# Altium PCB PCB2.PcbDoc
Units mil, origin at the board's own origin, x right, y up, seen from the top; angles counter-clockwise.
Board outline 2100 x 2100 mil, 2 copper layers (Top Layer, Bottom Layer); 94 components, 45 nets, 320 pads, 45 vias.
Unrouted connection lines stored in the file: 2.
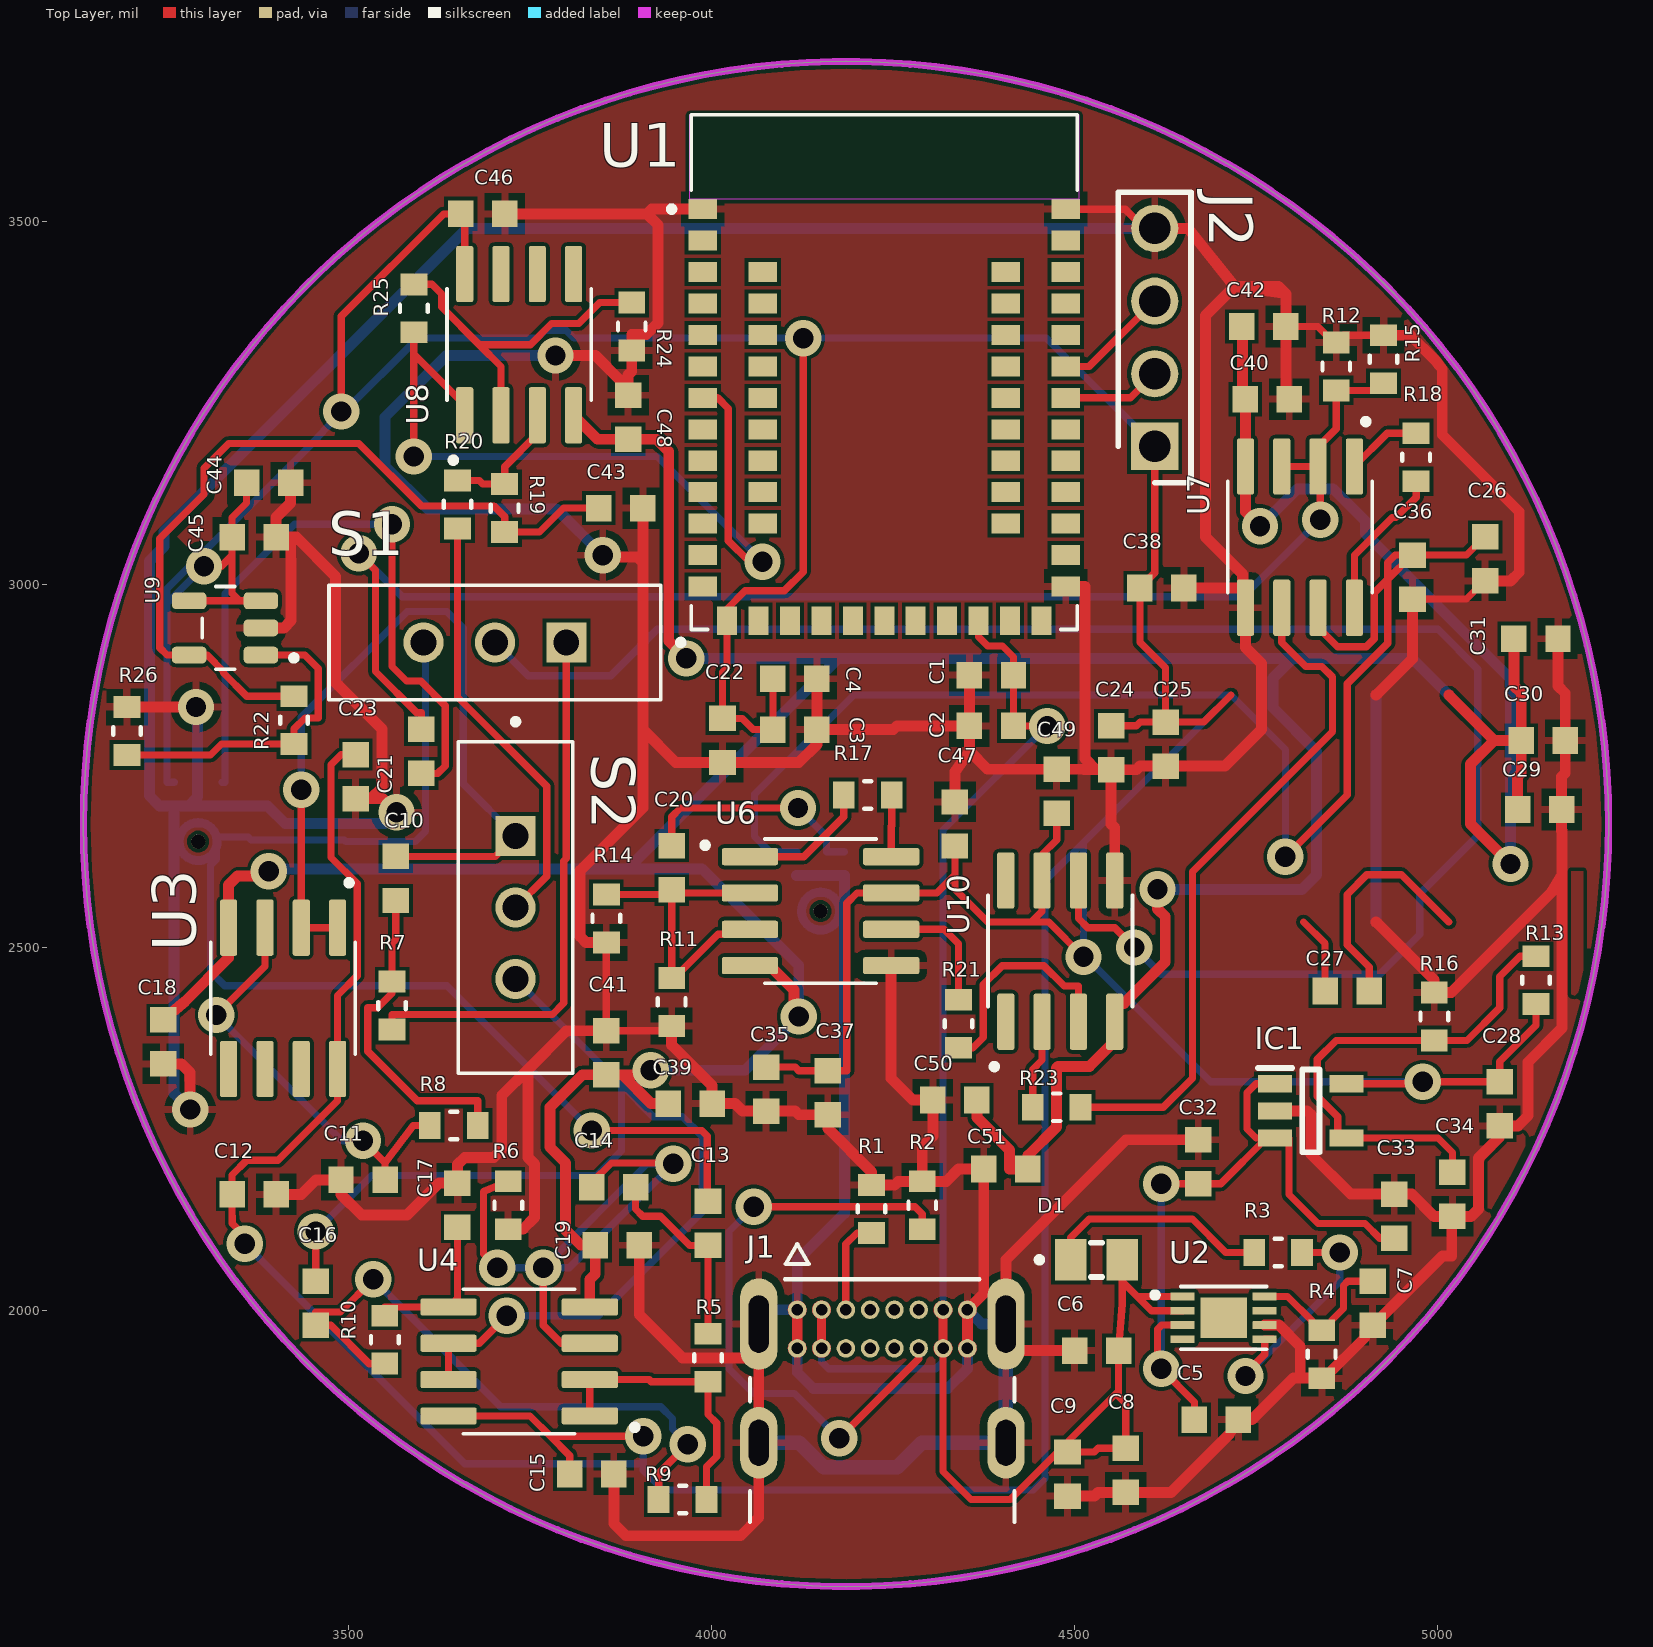
[diagram p0: Top Layer view]
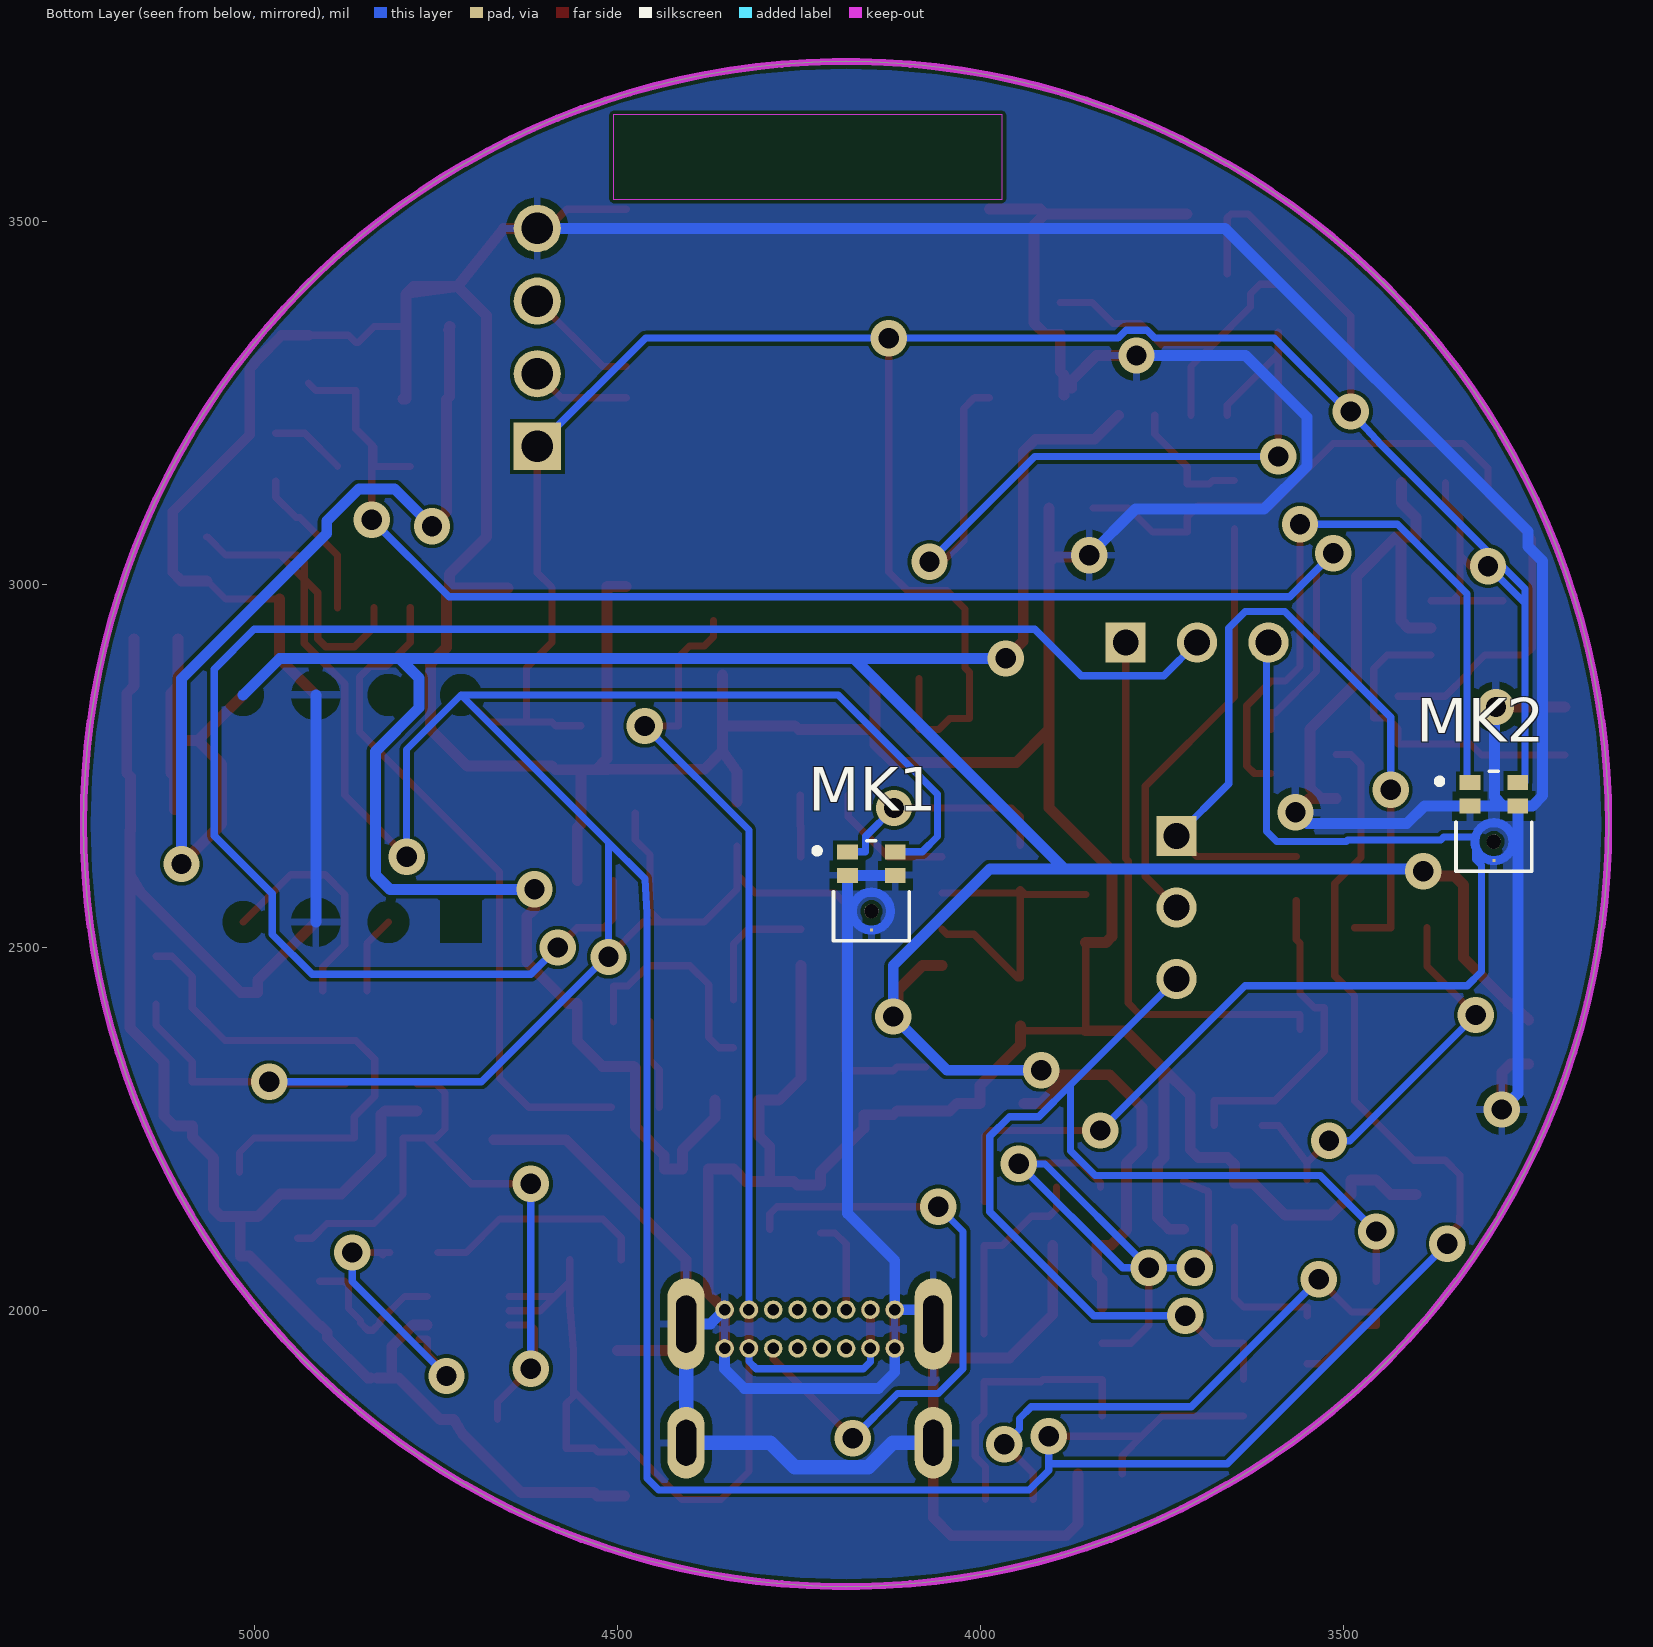
[diagram p1: Bottom Layer view, seen from below]
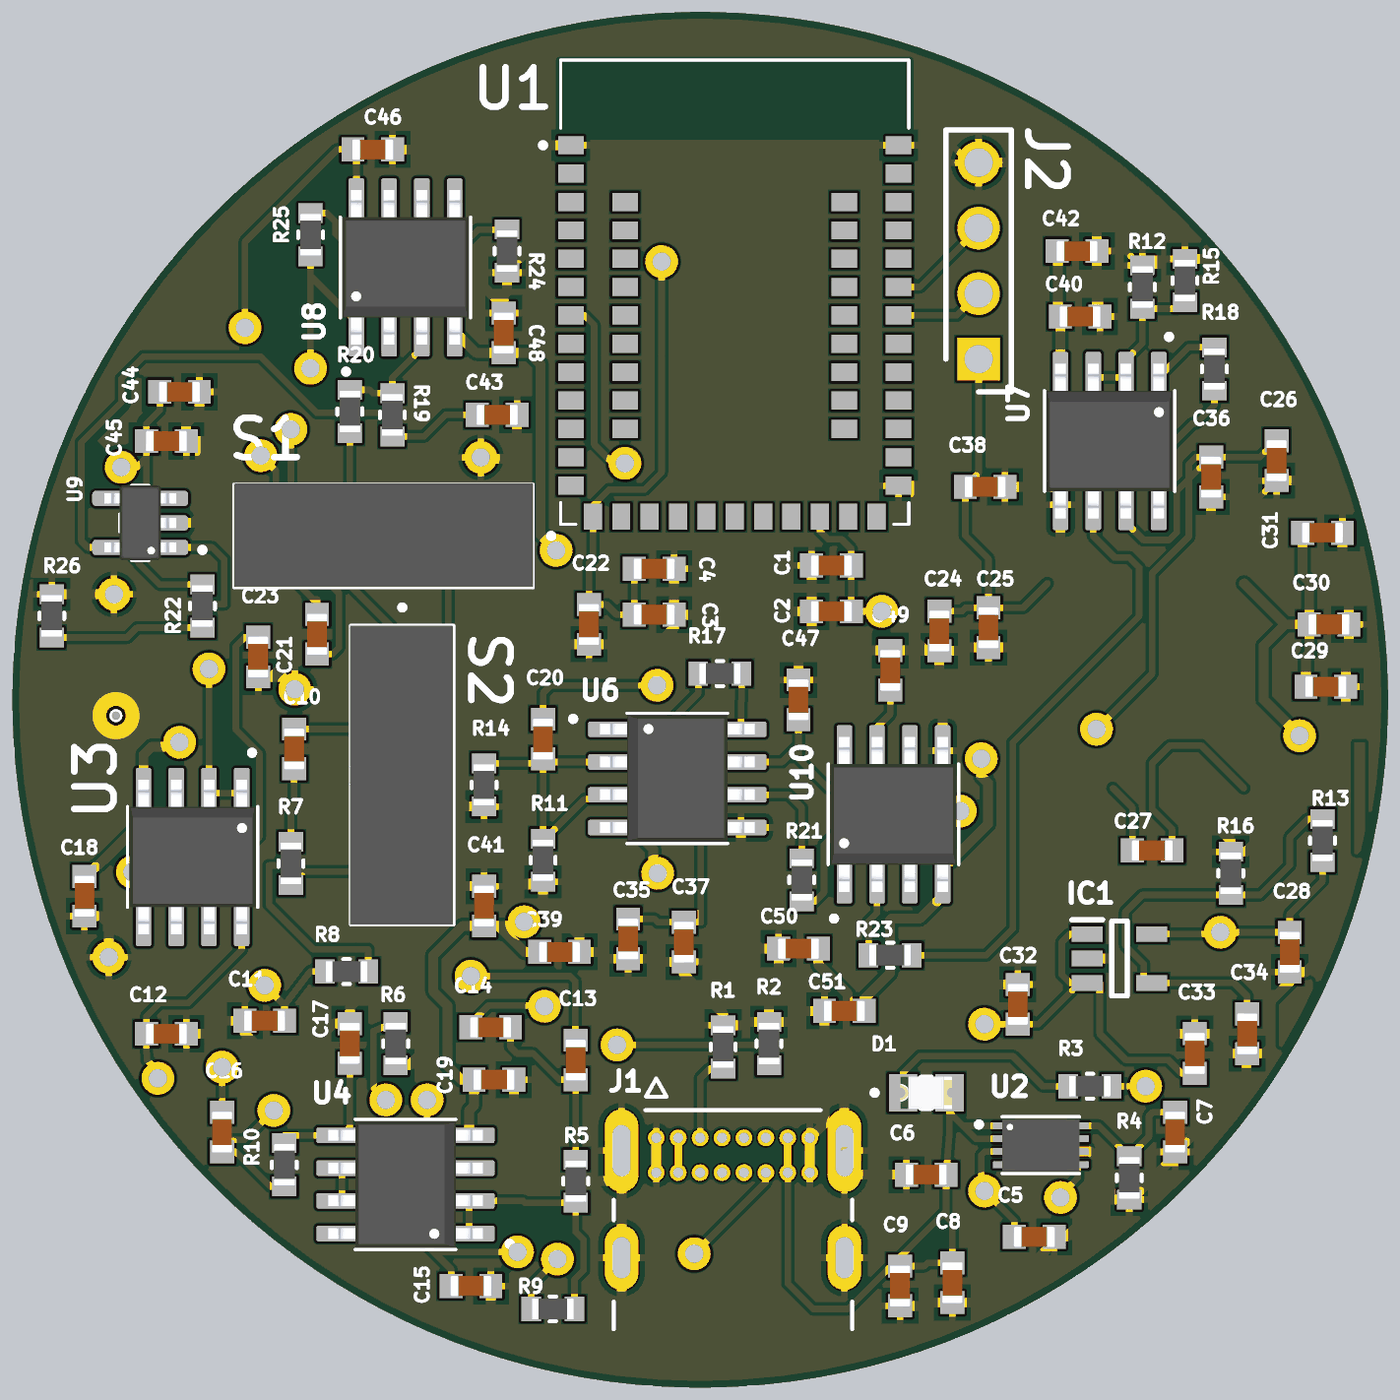
[diagram p2: 3D render of the assembled board from above, using the file's embedded part models]

## Layer stack, top to bottom
Top Solder: solder mask 0.4, Solder Resist, Dk 3.5
Top Layer: signal copper 1.4
Dielectric 1: dielectric 12.6, FR-4, Dk 4.8
Bottom Layer: signal copper 1.4
Bottom Solder: solder mask 0.4, Solder Resist, Dk 3.5

## Board outline
3135,2670 ccw(c4185,2670) 4185,1620 ccw(c4185,2670) 5235,2670 ccw(c4185,2670) 4185,3720 ccw(c4185,2670)

## Design rules (kind name [scope] priority, off if disabled: settings)
Clearance Clearance_1 [InNet('V_BATT')] p1: gap=5 ignorepadtopadclearanceinfootprint=FALSE
Clearance Clearance_5 [InNet('V_USB')] p2: gap=5 ignorepadtopadclearanceinfootprint=FALSE
Clearance Clearance_4 [InNet('GND')] p3: gap=5 ignorepadtopadclearanceinfootprint=FALSE
Clearance Clearance_3 [InNet('NetR3_1')] p4: gap=5 ignorepadtopadclearanceinfootprint=FALSE
Clearance Clearance_2 [InNet('NetC7_2')] p5: gap=5 ignorepadtopadclearanceinfootprint=FALSE
Clearance [All] p6: gap=10 ignorepadtopadclearanceinfootprint=FALSE
PolygonConnect [All] p1: connectstyle=Relief reliefconductorwidth=10 reliefentries=4 polygonreliefangle="90 Angle" airgapwidth=10
RoutingVias [All] p1: holewidth=28 width=50 viastyle="Through Hole" minholewidth=28 minwidth=50 maxholewidth=28 maxwidth=50
SolderMaskExpansion [All] p1: expansion=4 istentingtop=FALSE
SupplyNets "Schematic Supply Nets_5" [InNet('V_BATT')] p1: voltage=0.000
SupplyNets "Schematic Supply Nets_4" [InNet('VDD_-3.3V')] p2: voltage=0.000
SupplyNets "Schematic Supply Nets_3" [InNet('GND')] p3: voltage=0.000
SupplyNets "Schematic Supply Nets_2" [InNet('VDD_3.3V')] p4: voltage=0.000
SupplyNets "Schematic Supply Nets_1" [InNet('Ref')] p5: voltage=0.000
SupplyNets "Schematic Supply Nets" [InNet('V_USB')] p6: voltage=0.000
Width GND [InNet('GND')] p1: maxlimit=20 minlimit=10 preferedwidth=15 minimp=50.000000 maximp=50.000000 favimp=50.000000
Width -3V [InNet('VDD_-3.3V')] p2: maxlimit=20 minlimit=10 preferedwidth=15 minimp=50.000000 maximp=50.000000 favimp=50.000000
Width Width_1 [All] p3: maxlimit=10 minlimit=10 preferedwidth=10
Width 3V [InNet('VDD_3.3V')] p4: maxlimit=20 minlimit=10 preferedwidth=15 minimp=50.000000 maximp=50.000000 favimp=50.000000
30 further rules are at their usual default settings.

## Components (designator, comment, footprint, x,y, rotation, side; value= is the part's Value field where it differs from the comment)
C1 "1uF" CAPC1608X90N 4385.31,2875 r0 top
C2 "1uF" CAPC1608X90N 4385.31,2805 r0 top
C3 "1uF" CAPC1608X90N 4114.69,2800 r180 top
C4 "4.7uF" CAPC1608X90N 4114.69,2870 r180 top
C5 "4.7uF" CAPC1608X90N 4695,1850 r0 top
C6 "4.7uF" CAPC1608X90N 4530,1945 r0 top
C7 "10nF" CAPC1608X90N 4910,2010 r90 top
C8 "1uF" CAPC1608X90N 4570,1780 r90 top
C9 "1uF" CAPC1608X90N 4490,1775 r90 top
C10 "220nF" CAPC1608X90N 3565,2595 r270 top
C11 "100nF" CAPC1608X90N 3520,2180 r0 top
C12 "0.1uF" CAPC1608X90N 3370,2160 r180 top
C13 "10nF" CAPC1608X90N 3995,2120 r90 top
C14 "10nF" CAPC1608X90N 3865,2170 r0 top
C15 "10nF" CAPC1608X90N 3835,1775 r180 top
C16 "10nF" CAPC1608X90N 3455,2010 r90 top
C17 "10nF" CAPC1608X90N 3650,2145.32 r90 top
C18 "0.1uF" CAPC1608X90N 3245,2370 r270 top
C19 "10nF" CAPC1608X90N 3870,2090 r180 top
C20 "2.2uF" CAPC1608X90N 3945,2610 r90 top
C21 "2.2uF" CAPC1608X90N 3600,2770 r270 top
C22 "100nF" CAPC1608X90N 4015,2785 r90 top
C23 "100nF" CAPC1608X90N 3510,2735.32 r90 top
C24 "10uF" CAPC1608X90N 4550,2775 r90 top
C25 "10uF" CAPC1608X90N 4625,2780 r90 top
C26 "10uF" CAPC1608X90N 5065,3035 r90 top
C27 "10uF" CAPC1608X90N 4875,2440 r180 top
C28 "1uF" CAPC1608X90N 5085,2284.68 r270 top
C29 "10uF" CAPC1608X90N 5140,2690 r180 top
C30 "10uF" CAPC1608X90N 5145,2785 r180 top
C31 "10uF" CAPC1608X90N 5135,2925 r180 top
C32 "1uF" CAPC1608X90N 4670,2205 r90 top
C33 "10uF" CAPC1608X90N 4940,2130 r90 top
C34 "470pF" CAPC1608X90N 5020,2160 r270 top
C35 "1uF" CAPC1608X90N 4075,2305 r270 top
C36 "1uF" CAPC1608X90N 4965,3010 r270 top
C37 "0.1uF" CAPC1608X90N 4160,2300 r270 top
C38 "0.1uF" CAPC1608X90N 4620,2995 r0 top
C39 "1uF" CAPC1608X90N 3970.32,2285 r0 top
C40 "1uF" CAPC1608X90N 4765,3255 r0 top
C41 "0.1uF" CAPC1608X90N 3855,2355 r90 top
C42 "0.1uF" CAPC1608X90N 4760.31,3355 r0 top
C43 "0.022uF" CAPC1608X90N 3875,3105 r0 top
C44 "10uF" CAPC1608X90N 3390,3140 r0 top
C45 "1uF" CAPC1608X90N 3370,3065 r0 top
C46 "0.1uF" CAPC1608X90N 3685,3510 r180 top
C47 "1uF" CAPC1608X90N 4335,2670 r90 top
C48 "0.1uF" CAPC1608X90N 3885,3230 r270 top
C49 "0.1uF" CAPC1608X90N 4475,2715 r90 top
C50 "1uF" CAPC1608X90N 4335,2290 r180 top
C51 "0.1uF" CAPC1608X90N 4405,2195 r180 top
D1 "LED" LEDC2012X70N 4530,2070 r0 top
IC1 "MIC5219YM5-TR" SOT95P280X145-5N#1 4825,2275 r0 top
J1 "2137160001" MOLEX_2137160001 4235,1700 r0 top
J2 "90120-0764" HDRV4W90P0X254_1X4_994X249X560P 4610,3190 r90 top
MK1 "MP23ABS1TR" MIC_MP23ABS1TR 4150,2577.95 r180 bottom
MK2 "MP23ABS1TR" MIC_MP23ABS1TR 3292.97,2673.66 r180 bottom
R1 "5.1k" RESC1608X60N 4220,2140 r90 top
R2 "5.1k" RESC1608X60N 4290,2145 r270 top
R3 "470" RESC1608X60N 4780,2080 r180 top
R4 "2k" RESC1608X60N 4840,1940 r270 top
R5 "3.3k" RESC1608X60N 3995,1935 r90 top
R6 "3.3k" RESC1608X60N 3720,2145 r90 top
R7 "2.2k" RESC1608X60N 3560,2420 r270 top
R8 "3.3k" RESC1608X60N 3645,2255 r0 top
R9 "3.3k" RESC1608X60N 3960,1740 r0 top
R10 "3.3k" RESC1608X60N 3550,1960 r270 top
R11 "100k" RESC1608X60N 3945,2425 r270 top
R12 "100k" RESC1608X60N 4860,3300 r90 top
R13 "9.1k" RESC1608X60N 5135,2455 r90 top
R14 "100k" RESC1608X60N 3855,2540 r90 top
R15 "100k" RESC1608X60N 4925,3310 r270 top
R16 "15k" RESC1608X60N 4995,2405 r90 top
R17 "12k" RESC1608X60N 4215,2710 r0 top
R18 "12k" RESC1608X60N 4970,3175 r270 top
R19 "10k" RESC1608X60N 3715,3105 r90 top
R20 "1k" RESC1608X60N 3650,3110 r270 top
R21 "100k" RESC1608X60N 4340,2395 r90 top
R22 "2.4k" RESC1608X60N 3425,2813 r270 top
R23 "100k" RESC1608X60N 4475,2280 r180 top
R24 "1k" RESC1608X60N 3890,3355 r270 top
R25 "10k" RESC1608X60N 3590,3380 r90 top
R26 "6.5k" RESC1608X60N 3195,2798 r90 top
S1 "MINI-SPDT-SW" SW_MINI-SPDT-SW 3701.57,2920 r180 top
S2 "MINI-SPDT-SW" SW_MINI-SPDT-SW 3730,2555 r270 top
U1 "HOLYIOT-18010-NRF52840" XCVR_HOLYIOT-18010-NRF52840 4237.68,3292.2 r0 top
U2 "MCP73831-2ACI/MC" SON50P200X300X100-9N 4705,1990 r0 top
U3 "TL082CD" SOIC127P599X175-8N 3410,2430 r270 top
U4 "TL082CD" SOIC127P599X175-8N 3735,1930 r180 top
U6 "INA818IDR" SOIC127P599X175-8N 4150,2550 r0 top
U7 "INA818IDR" SOIC127P599X175-8N 4810,3065 r270 top
U8 "TL082CD" SOIC127P599X175-8N 3735,3330 r90 top
U9 "LM4121IM5-ADJ/NOPB" SOT95P280X145-5N#2 3330,2940 r180 top
U10 "INA818IDR" SOIC127P599X175-8N 4480,2495 r90 top

## Footprints (in the part's own frame and the unit in brackets; to place one, negate y for a bottom-side part, rotate by r counter-clockwise, add the part's x,y. Pads: shape width x height; smd on the part's side, far side on the other; paste and mask are expansions set on the pad)
CAPC1608X90N [mm]
  rect 0.89x0.93 smd: 1(-0.77,0) 2(0.77,0)
  body extent -0.8,-0.4 0.8,0.4, height 0.9
HDRV4W90P0X254_1X4_994X249X560P [mm]
  rect 1.65x1.65 hole 1.1: 1(0,0)
  round 1.65 hole 1.1: 2(2.54,0) 3(5.08,0) 4(7.62,0)
  silkscreen extent -1.27,-1.27 8.89,1.27
LEDC2012X70N [mm]
  rect 1.1x1.45 smd: A(0.9,0) C(-0.9,0)
  silkscreen extent -2.1,-0.6 0.2,0.6, body extent -1,-0.63 1,0.63, height 0.7
MIC_MP23ABS1TR [mm]
  rect 0.725x0.522 smd paste-1: 1(-0.837,1.364) 2(-0.837,0.542) 4(0.837,0.542) 5(0.837,1.364)
  rect 0.1x0.1 smd paste-1 mask+0: 3(0,-1.372)
  round 0.5 hole 0.5 unplated mask+0.662: ""(0,-0.71)
  Top Layer region: 242 vertices and 0 holes, not listed, extent -0.813,-1.522 0.813,0.102
  silkscreen extent -2,-1.75 1.33,1.75, body extent -1.33,-1.75 1.33,1.75, height 1.08
MOLEX_2137160001 [mm]
  round 0.648 hole 0.4 mask+0.064: A1(-2.975,7.65) A4(-2.125,7.65) A5(-1.275,7.65) A6(-0.425,7.65) A7(0.425,7.65) A8(1.275,7.65) A9(2.125,7.65) A12(2.975,7.65) B1(2.975,6.3) B4(2.125,6.3) B5(1.275,6.3) B6(0.425,6.3) B7(-0.425,6.3) B8(-1.275,6.3) B9(-2.125,6.3) B12(-2.975,6.3)
  oval 1.3x2.5 hole 0.7 slot 1.6 at 90 deg mask+0.064: SH1(-4.32,3) SH2(4.32,3)
  oval 1.3x3.2 hole 0.7 slot 2 at 90 deg mask+0.064: SH3(-4.32,7.15) SH4(4.32,7.15)
  Top Layer region: 3.032,7.969 3.087,7.954 3.139,7.929 3.186,7.896 3.226,7.855 3.258,7.808 3.281,7.756 3.295,7.7 3.299,7.643 3.293,7.586 3.277,7.531 3.251,7.48 3.217,7.434 3.175,7.395 3.125,7.363 3.125,6.587 3.175,6.555 3.217,6.516 3.251,6.47 3.277,6.419 3.293,6.364 3.299,6.307 3.295,6.25 3.281,6.194 3.258,6.142 3.226,6.095 3.186,6.054 3.139,6.021 3.087,5.996 3.032,5.981 2.975,5.976 2.918,5.981 2.863,5.996 2.811,6.021 2.764,6.054 2.724,6.095 2.692,6.142 2.669,6.194 2.655,6.25 2.651,6.307 2.657,6.364 2.673,6.419 2.699,6.47 2.733,6.516 2.775,6.555 2.825,6.587 2.825,7.363 2.775,7.395 2.733,7.434 2.699,7.48 2.673,7.531 2.657,7.586 2.651,7.643 2.655,7.7 2.669,7.756 2.692,7.808 2.724,7.855 2.764,7.896 2.811,7.929 2.863,7.954 2.918,7.969 2.975,7.974
  Top Layer region: 2.182,7.969 2.237,7.954 2.289,7.929 2.336,7.896 2.376,7.855 2.408,7.808 2.431,7.756 2.445,7.7 2.449,7.643 2.443,7.586 2.427,7.531 2.401,7.48 2.367,7.434 2.325,7.395 2.275,7.363 2.275,6.587 2.325,6.555 2.367,6.516 2.401,6.47 2.427,6.419 2.443,6.364 2.449,6.307 2.445,6.25 2.431,6.194 2.408,6.142 2.376,6.095 2.336,6.054 2.289,6.021 2.237,5.996 2.182,5.981 2.125,5.976 2.068,5.981 2.013,5.996 1.961,6.021 1.914,6.054 1.874,6.095 1.842,6.142 1.819,6.194 1.805,6.25 1.801,6.307 1.807,6.364 1.823,6.419 1.849,6.47 1.883,6.516 1.925,6.555 1.975,6.587 1.975,7.363 1.975,7.363 1.925,7.395 1.883,7.434 1.849,7.48 1.823,7.531 1.807,7.586 1.801,7.643 1.805,7.7 1.819,7.756 1.842,7.808 1.874,7.855 1.914,7.896 1.961,7.929 2.013,7.954 2.068,7.969 2.125,7.974
  Top Layer region: -2.068,7.969 -2.013,7.954 -1.961,7.929 -1.914,7.896 -1.874,7.855 -1.842,7.808 -1.819,7.756 -1.805,7.7 -1.801,7.643 -1.807,7.586 -1.823,7.531 -1.849,7.48 -1.883,7.434 -1.925,7.395 -1.975,7.363 -1.975,6.587 -1.925,6.555 -1.883,6.516 -1.849,6.47 -1.823,6.419 -1.807,6.364 -1.801,6.307 -1.805,6.25 -1.819,6.194 -1.842,6.142 -1.874,6.095 -1.914,6.054 -1.961,6.021 -2.013,5.996 -2.068,5.981 -2.125,5.976 -2.182,5.981 -2.237,5.996 -2.289,6.021 -2.336,6.054 -2.376,6.095 -2.408,6.142 -2.431,6.194 -2.445,6.25 -2.449,6.307 -2.443,6.364 -2.427,6.419 -2.401,6.47 -2.367,6.516 -2.325,6.555 -2.275,6.587 -2.275,7.363 -2.325,7.395 -2.367,7.434 -2.401,7.48 -2.427,7.531 -2.443,7.586 -2.449,7.643 -2.445,7.7 -2.431,7.756 -2.408,7.808 -2.376,7.855 -2.336,7.896 -2.289,7.929 -2.237,7.954 -2.182,7.969 -2.125,7.974
  Top Layer region: -2.918,7.969 -2.863,7.954 -2.811,7.929 -2.764,7.896 -2.724,7.855 -2.692,7.808 -2.669,7.756 -2.655,7.7 -2.651,7.643 -2.657,7.586 -2.673,7.531 -2.699,7.48 -2.733,7.434 -2.775,7.395 -2.825,7.363 -2.825,6.587 -2.775,6.555 -2.733,6.516 -2.699,6.47 -2.673,6.419 -2.657,6.364 -2.651,6.307 -2.655,6.25 -2.669,6.194 -2.692,6.142 -2.724,6.095 -2.764,6.054 -2.811,6.021 -2.863,5.996 -2.918,5.981 -2.975,5.976 -3.032,5.981 -3.087,5.996 -3.139,6.021 -3.186,6.054 -3.226,6.095 -3.258,6.142 -3.281,6.194 -3.295,6.25 -3.299,6.307 -3.293,6.364 -3.277,6.419 -3.251,6.47 -3.217,6.516 -3.175,6.555 -3.125,6.587 -3.125,7.363 -3.175,7.395 -3.217,7.434 -3.251,7.48 -3.277,7.531 -3.293,7.586 -3.299,7.643 -3.295,7.7 -3.281,7.756 -3.258,7.808 -3.226,7.855 -3.186,7.896 -3.139,7.929 -3.087,7.954 -3.032,7.969 -2.975,7.974
  silkscreen extent -4.62,0.22 4.62,9.95
RESC1608X60N [mil]
  rect 30x37 smd: 1(-33,0) 2(33,0)
  silkscreen extent -5,-19 5,19, body extent -31,-16 31,16, height 22
SOIC127P599X175-8N [mm]
  rrect25% 1.97x0.6 smd: 1(-2.47,1.905) 2(-2.47,0.635) 3(-2.47,-0.635) 4(-2.47,-1.905) 5(2.47,-1.905) 6(2.47,-0.635) 7(2.47,0.635) 8(2.47,1.905)
  silkscreen extent -4.14,-2.53 1.95,2.53, body extent -3,-2.45 3,2.45, height 1.75
SON50P200X300X100-9N [mm]
  rrect7% 0.84x0.27 smd: 1(-1.435,0.75) 2(-1.435,0.25) 3(-1.435,-0.25) 4(-1.435,-0.75) 5(1.435,-0.75) 6(1.435,-0.25) 7(1.435,0.25) 8(1.435,0.75)
  rect 1.625x1.425 smd paste-2: 9(0,0)
  silkscreen extent -2.5,-1.1 1.5,1.1, body extent -1.5,-1 1.5,1, height 1
SOT95P280X145-5N#1 [mm]
  rect 1.2x0.6 smd: 1(-1.25,0.95) 2(-1.25,0) 3(-1.25,-0.95) 4(1.25,-0.95) 5(1.25,0.95)
  silkscreen extent -1.85,-1.45 0.3,1.5
SOT95P280X145-5N#2 [mm]
  rrect50% 1.21x0.59 smd: 1(-1.255,0.95) 2(-1.255,0) 3(-1.255,-0.95) 4(1.255,-0.95) 5(1.255,0.95)
  silkscreen extent -2.51,-1.45 0.8,1.45, body extent -1.4,-1.45 1.4,1.45, height 1.45
SW_MINI-SPDT-SW [mm]
  rect 1.408x1.408 hole 0.9: 1(-2.5,0)
  round 1.408 hole 0.9: 2(0,0) 3(2.5,0)
  silkscreen extent -6.6,-2 5.8,2, body extent -5.8,-2.03 5.8,1.97, height 7.4
XCVR_HOLYIOT-18010-NRF52840 [mm]
  rect 1x0.7 smd: 1(-6.35,5.7) 2(-6.35,4.6) 3(-6.35,3.5) 4(-6.35,2.4) 5(-6.35,1.3) 6(-6.35,0.2) 7(-6.35,-0.9) 8(-6.35,-2) 9(-6.35,-3.1) 10(-6.35,-4.2) 11(-6.35,-5.3) 12(-6.35,-6.4) 13(-6.35,-7.5) 25(6.35,-7.5) 26(6.35,-6.4) 27(6.35,-5.3) 28(6.35,-4.2) 29(6.35,-3.1) 30(6.35,-2) 31(6.35,-0.9) 32(6.35,0.2) 33(6.35,1.3) 34(6.35,2.4) 35(6.35,3.5) 36(6.35,4.6) 37(6.35,5.7) 38(-4.25,3.5) 39(-4.25,2.4) 40(-4.25,1.3) 41(-4.25,0.2) 42(-4.25,-0.9) 43(-4.25,-2) 44(-4.25,-3.1) 45(-4.25,-4.2) 46(-4.25,-5.3) 47(4.25,3.5) 48(4.25,2.4) 49(4.25,1.3) 50(4.25,0.2) 51(4.25,-0.9) 52(4.25,-2) 53(4.25,-3.1) 54(4.25,-4.2) 55(4.25,-5.3)
  rect 0.7x1 smd: 14(-5.5,-8.7) 15(-4.4,-8.7) 16(-3.3,-8.7) 17(-2.2,-8.7) 18(-1.1,-8.7) 19(0,-8.7) 20(1.1,-8.7) 21(2.2,-8.7) 22(3.3,-8.7) 23(4.4,-8.7) 24(5.5,-8.7)
  Keep-Out Layer region: 6.8,6.05 -6.8,6.05 -6.8,9 6.8,9
  Keep-Out Layer region: 6.8,6.05 -6.8,6.05 -6.8,9 6.8,9
  silkscreen extent -7.54,-9 6.75,9

## Part data
C1 C2 C3 C4 C5 C6 C7 C8 C9 C10 C11 C12 C13 C14 C15 C16 C17 C18 C19 C20 C21 C22 C23 C24 C25 C26 C27 C28 C29 C30 C31 C32 C33 C34 C35 C36 C37 C38 C39 C40 C41 C42 C43 C44 C45 C46 C47 C48 C49 C50 C51: library part CL10B104KB8NNNC, "0.1 ÂµF Â±10% 50V Ceramic Capacitor X7R 0603 (1608 Metric)", Package="1608-2 SAMSUNG", Check_prices=https://www.snapeda.com/parts/CL10B104KB8NNNC/Samsung/view-part/?ref=eda, MF="Samsung Electro-Mechanics", MP=CL10B104KB8NNNC, SnapEDA_Link=https://www.snapeda.com/parts/CL10B104KB8NNNC/Samsung/view-part/?ref=snap
D1: library part 597-5411-407F, "SMD LED 0805 YG 7", Package="0805 Dialight", Check_prices=https://www.snapeda.com/parts/597-5411-407F/Dialight/view-part/?ref=eda, MF=Dialight, MP=597-5411-407F, SnapEDA_Link=https://www.snapeda.com/parts/597-5411-407F/Dialight/view-part/?ref=snap
IC1: "Integrated Circuit", Manufacturer_Name=Microchip, Mouser Part Number=998-MIC5219YM5TR, Arrow Part Number=MIC5219YM5-TR, Arrow Price/Stock=https://www.arrow.com/en/products/mic5219ym5-tr/microchip-technology?utm_currency=USD&region=nac, Datasheet Link=http://www.microchip.com/mymicrochip/filehandler.aspx?ddocname=en579712, Height=1.45mm, Manufacturer_Part_Number=MIC5219YM5-TR, Mouser Price/Stock=https://www.mouser.co.uk/ProductDetail/Microchip-Technology/MIC5219YM5-TR?qs=U6T8BxXiZAWfHDmqF70%2FoQ%3D%3D
J1: "USB-C (USB TYPE-C) USB 2.0 Receptacle Connector 24 (16+8 Dummy) Position Through Hole, Right Angle", Package=None, Check_prices=https://www.snapeda.com/parts/2137160001/Molex/view-part/?ref=eda, MF=Molex, MP=2137160001, SnapEDA_Link=https://www.snapeda.com/parts/2137160001/Molex/view-part/?ref=snap
J2: "Connector", Manufacturer_Name=Molex, Mouser Part Number=538-90120-0764, Datasheet Link=https://www.molex.com/webdocs/datasheets/pdf/en-us/0901200764_PCB_HEADERS.pdf, Height=5.6mm, Manufacturer_Part_Number=90120-0764, Mouser Price/Stock=https://www.mouser.co.uk/ProductDetail/Molex/90120-0764?qs=QSnLD11VNirsMTdnHEPG3Q%3D%3D
MK1 MK2: "35 Hz ~ 1.5 kHz Analog Microphone MEMS (Silicon) Omnidirectional (-38dB Â±1dB @ 94dB SPL) Solder Pads", Package=None, Check_prices=https://www.snapeda.com/parts/MP23ABS1TR/STMicroelectronics/view-part/?ref=eda, MF=STMicroelectronics, MP=MP23ABS1TR, SnapEDA_Link=https://www.snapeda.com/parts/MP23ABS1TR/STMicroelectronics/view-part/?ref=snap
R1 R2 R3 R4 R5 R6 R7 R8 R9 R10 R11 R12 R13 R14 R15 R16 R17 R18 R19 R20 R21 R22 R23 R24 R25 R26: library part RC0603FR-0751RL, "51 Ohms Â±1% 0.1W, 1/10W Chip Resistor 0603 (1608 Metric) Moisture Resistant Thick Film", Package="0603-2 YAGEO", Check_prices=https://www.snapeda.com/parts/RC0603FR0751RL/Yageo/view-part/?ref=eda, MF="Yageo Corporation", MP=RC0603FR0751RL, SnapEDA_Link=https://www.snapeda.com/parts/RC0603FR0751RL/Yageo/view-part/?ref=snap
S1 S2: "Simple breadboard friendly SPDT slide switch. Rated at 30V/200mA with operating force of 250 +/-100gf.", Package=None, Availability=Unavailable, MP=MINI-SPDT-SW, Price=None
U1: "Holyiot 18010 Nordic nRF52840 module Bluetooth low energy module", Package=Package, Check_prices=https://www.snapeda.com/parts/HOLYIOT-18010-NRF52840/Holyiot/view-part/?ref=eda, MF=Holyiot, MP=HOLYIOT-18010-NRF52840, SnapEDA_Link=https://www.snapeda.com/parts/HOLYIOT-18010-NRF52840/Holyiot/view-part/?ref=snap
U2: "Charge Controller Li-Ion/Li-Pol 15mA to 500mA 4.2V 8-Pin DFN EP", Package="VFDFN-8 Microchip", Check_prices=https://www.snapeda.com/parts/MCP73831-2ACI/MC/Microchip/view-part/?ref=eda, MF=Microchip, MP=MCP73831-2ACI/MC, SnapEDA_Link=https://www.snapeda.com/parts/MCP73831-2ACI/MC/Microchip/view-part/?ref=snap
U3 U4 U8: "Dual, 30-V, 3-MHz, 13-V/Âµs slew rate, In to V+, JFET-input op amp", Package="SOIC-8 Texas Instruments", Check_prices=https://www.snapeda.com/parts/TL082CD/Texas+Instruments/view-part/?ref=eda, MF="Texas Instruments", MP=TL082CD, SnapEDA_Link=https://www.snapeda.com/parts/TL082CD/Texas+Instruments/view-part/?ref=snap
U6 U7 U10: "Low power (350-ÂµA), precision instrumentation amp with Â±60-V overvoltage protection (gain pins 1, 8)", Package="SOIC-8 Texas Instruments", Check_prices=https://www.snapeda.com/parts/INA818IDR/Texas+Instruments/view-part/?ref=eda, MF="Texas Instruments", MP=INA818IDR, SnapEDA_Link=https://www.snapeda.com/parts/INA818IDR/Texas+Instruments/view-part/?ref=snap
U9: "Fixed & adjustable-voltage, 0.2% 50-ppm/Â°C drift precision series voltage reference with enable pin", Package="SOT-23-5 Texas Instruments", Check_prices=https://www.snapeda.com/parts/LM4121IM5-ADJ/NOPB/Texas+Instruments/view-part/?ref=eda, MF="Texas Instruments", MP=LM4121IM5-ADJ/NOPB, SnapEDA_Link=https://www.snapeda.com/parts/LM4121IM5-ADJ/NOPB/Texas+Instruments/view-part/?ref=snap

## Via types
v1: diameter 50, hole 28, Top Layer to Bottom Layer, 45 vias

## Nets (pads, with @x,y where several pads share a name; then routed paths per layer and width w, separated by ;. In a path a pad name is that pad's centre, name@x,y a point inside that pad or via, vN(x,y) a via of type N, cw(c..) or ccw(c..) an arc to the next point about the centre after c; other vN are vias at no path point)
+IN1: C20.1 R11.1 R14.2 U6.2 U6.3 | length 459.7
  Top Layer w10: R14.2 3938.31,2573 C20.1 ; U6.3 4045.94,2518.19 4008.69,2518.19 3948.5,2458 R11.1 C20.1 ; U6.2 3949.69,2575 C20.1
+IN2: C21.1 R12.1 R15.2 U7.2 U7.3 | length 2011.9
  Top Layer w10: v1(3514,3042.72) 3537.16,3019.55 3537.16,2880 3594.01,2823.15 3600,2823.15 C21.1 ; U7.3 U7.2 4835,3189.21 U7.2@4838,3192.21 ; v1(4838,3089) U7.2@4838,3192.21 ; R15.2 4915,3267 R12.1 4860,3246 4860,3214.21 U7.2@4838,3192.21
  Bottom Layer w10: v1(3514,3042.72) 3574,2982.72 4731.72,2982.72 v1(4838,3089)
"+IN SUB": R21.2 U6.6 | length 178
  Top Layer w10: U6.6 4320,2525 4340,2505 R21.2
"-IN SUB": R23.1 U7.6 | length 940.2
  Top Layer w10: R23.1 4622,2280 4662,2320 4662,2604.42 4855,2797.42 4855,2872 4840,2887 4818,2887 4785,2920 U7.6
GND: C1.1 C2.1 C3.1 C4.1 C5.2 C6.1 C7.1 C8.1 C9.1 C11.1 C12.1 C15.1 C17.2 C18.2 C19.1 C22.1 C23.1 C24.1 C25.1 C26.1 C28.2 C29.1 C30.1 C31.1 C32.2 C33.2 C34.2 C35.2 C36.2 C37.2 C38.2 C39.2 C40.2 C41.2 C42.2 C43.2 C44.2 C45.2 C46.1 C47.2 C48.1 C49.2 C50.2 C51.2 IC1.2 J1.A1 J1.A12 J1.B1 J1.B12 J1.SH1 J1.SH2 J1.SH3 J1.SH4 J2.4 MK1.2 MK1.3 MK1.4 MK2.2 MK2.3 MK2.4 R1.2 R2.1 R4.2 R6.1 R11.2 R12.2 R14.1 R15.1 R16.2 R24.2 R26.2 U1.1 U1.25 U1.37 U2.6 U6.5 U7.5 U9.2 U10.5 | length 17863.4
  Top Layer w10: R14.1 C41.2 3938.32,2385.32 R11.2 ; U1.37 4569.47,3516.61 4596.08,3490 J2.4 ; C42.2 4834.5,3355 4856.5,3333 R12.2 4870,3343 R15.1 ; C36.2 5039.21,2979.69 5064.21,3004.69 C26.1
  Top Layer w15: R26.2 v1(3290,2831) ; C18.2 3270,2339.69 3282,2327.69 v1(3282,2277) ; U9.2 3411,2940 3421,2950 3421,3065 ; C12.1 3435,2160 3455,2180 C11.1 3489.69,2160 3518.19,2131.5 3580.5,2131.5 3624.63,2175.63 C17.2 3650,2201 3660,2211 3700,2211 3711,2222 3711,2296 3747,2332 ; C44.2 3420.32,3112 3400.32,3092 C45.2 3421,3065 ; C23.1 3531,2705 ; v1(3566,2686) 3547,2705 3531,2705 ; C46.1 3911,3510 ; R6.1 3740,2112 3756,2128 3756,2202 3747,2211 3747,2332 ; v1(3785,3315) 3840,3315 3874.19,3280.81 3874.19,3270.34 3874.53,3270 C48.1@3885,3270 ; v1(3850,3040) 3852.18,3037.82 3897.5,3037.82 3905.32,3030 ; C41.2 3800.32,2385.32 3747,2332 ; R14.1 3827,2507 3819,2515 3819,2606 3905.32,2692.32 3905.32,2800 ; C15.1 3865.32,1706.68 3882,1690 4040,1690 4064.92,1714.92 J1.SH1 J1.SH3@4064.92,1935 ; C48.1 C48.1@3885,3270 ; C19.1 3900.32,1994.68 3960,1935 J1.SH3@4064.92,1935 ; C43.2 3905.32,3030 ; R11.2 3945,2365.63 4000.63,2310 C39.2 4032,2285 4042.31,2274.69 C35.2 4115,2274.69 4120,2269.69 C37.2 4160,2251 4220,2191 R1.2 4252,2173 4257,2178 R2.1 ; U1.1 3917.61,3516.61 3911,3510 ; J1.SH3 J1.SH3@4064.92,1935 ; J1.B12 J1.A1 ; C4.1 C3.1 ; U6.5 4247,2475 4247,2320 4277,2290 C50.2 4304.69,2240.69 4290,2226 R2.1 ; C47.2 4335,2742 4355,2770.32 ; J1.B1 J1.A12 4374.69,2023.74 C51.2 4340,2195 4323,2178 R2.1 ; C1.1 C2.1 ; U1.25 4514,2996.93 4514,2760 4529.31,2744.69 ; C9.1 4527,1744.69 4532,1749.69 C8.1 4632.69,1749.69 4713,1830 C5.2 4744,1850 4801,1907 4810.5,1907 ; C6.1 4405.08,1945 J1.SH4 4405.08,2070 4570.39,2235.32 C32.2 ; U10.5 4555,2665 4550,2670 C24.1 ; J2.4 4656.42,3490 4720,3410 ; C38.2 4730.69,2995 U7.5@4735,2990.69 ; U2.6 4781.12,1980.16 4810.5,1950.78 4810.5,1907 ; IC1.2 4819.79,2275 4825,2269.79 4825,2215.32 4880,2160.32 C33.2 4964,2160.32 4994.63,2129.69 C34.2@5019,2129.69 ; C40.2 4790.63,3255 C42.2 4790.63,3400 ; R4.2@4831,1907 4810.5,1907 ; R4.2 4843.5,1907 4899.19,1962.69 4899.19,1969.67 4909.21,1979.69 4910.79,1979.69 5006.1,2075 5019,2075 C34.2@5019,2129.69 ; 4915,2535 4995,2455 R16.2 5018.32,2438 5156.64,2576.32 5171,2600.82 ; 4915,2847.6 4965,2897.6 C36.2 ; R15.1 4962,3343 4996.04,3308.96 cw(c4185,2670) 5006,3296.11 5006,3206 5112,3100 5112,3016.69 5100,3004.69 C26.1 ; C31.1 5165.32,2860 5175.32,2850 C30.1 5175.32,2740 5170.32,2735 C29.1 5170.32,2660.68 ; 5171,2660.68 5171,2600.82 ; 3421,3065 3428,3065 3482,3011 3482,2864.65 3546,2800.65 3546,2720 3531,2705 ; C48.1@3885,3270 3885,3288 3890,3293 R24.2 3890,3344 3910,3344 3926,3360 3926,3495 3911,3510 ; 3905.32,2800 3905.32,3030 ; 3905.32,2800 3950.63,2754.69 C22.1 4120,2754.69 4145,2779.69 C3.1 ; C3.1 4250,2800 4255,2805 C2.1 ; 4355,2770.32 C2.1 ; 4355,2770.32 4380,2745.32 C49.2 4512,2745.32 4512.63,2744.69 4529.31,2744.69 ; 4529.31,2744.69 C24.1 ; C24.1 4585,2744.69 4590,2749.69 C25.1 4706.69,2749.69 4757,2800 4757,2891 4735,2913 U7.5 U7.5@4735,2990.69 ; 4720,3410 4780.63,3410 4790.63,3400 ; 4720,3410 4680,3370 4680,3065 4730.96,3014.04 4730.96,2994.73 U7.5@4735,2990.69 ; 4720,3410 4790.63,3400 ; C34.2@5019,2129.69 C34.2 5045.69,2129.69 5056,2140 5056,2210 5085,2239 C28.2 5110,2254.37 5124,2268.37 5124,2342 5171,2389 5171,2600.82
  Bottom Layer w15: v1(3282,2277) 3260,2299 MK2.4 ; v1(3290,2831) 3292,2829 3292,2707 3280,2695 ; v1(3566,2686) 3550.47,2670.47 3412.97,2670.47 3388.44,2695 MK2.2 3280,2695 ; v1(3785,3315) 3635,3315 3550,3230 3550,3162.97 3609.39,3103.58 3786.42,3103.58 v1(3850,3040) ; J1.SH3 4084.61,2001.18 J1.A1 4117.87,2068.87 4182.97,2133.97 MK1.2 MK1.4 ; J1.B12 4117.87,1915.13 4140,1893 4325.13,1893 4352.13,1920 J1.B1 ; J1.A12 4371.81,1981.5 J1.SH4 ; J2.4 3663,3490 3246,3073 3246,3052 3226,3032 3226,2709 3240,2695 MK2.4 ; 4915,2535 4915,2847.6 ; MK2.4 3280,2695
  Bottom Layer w20: J1.SH1 4120.51,1818.11 4154.43,1784.2 4255.59,1784.2 4289.51,1818.11 J1.SH2 J1.SH4
INA1: R7.2 S1.1 | length 761.8
  Top Layer w10: R7.2 3560,2407.82 3780.82,2407.82 3796.5,2423.5 3796.5,2619 3800,2622.5 S1.1
INA2: C13.2 S1.3 | length 1614.8
  Top Layer w10: v1(3835,2248) 3986.5,2248 3994,2240.5 3994,2150.32 C13.2
  Bottom Layer w10: S1.3 3606,2917.15 3606,2660 3592,2646 3495.94,2646 3493.97,2647.97 3365.94,2647.97 3361.91,2652 3318,2652 3317.82,2651.82 3317.82,2621 3310,2613.18 3310,2467 3329.69,2447.31 3635.69,2447.31 v1(3835,2248)
NetC7_2: C7.2 R4.1 U2.8 | length 217.9
  Top Layer w10: U2.8 4793.03,2019.53 4826.5,1986.06 4826.5,1983 4836.5,1973 R4.1 4843.5,1973 4853.5,1983 4853.5,1986.5 4870,2003 4870,2034.46 4875.86,2040.32 C7.2
NetC10_2: C10.2 R7.1 R8.2 | length 445.2
  Top Layer w10: C10.2 3565,2511 3560,2506 R7.1 3560,2437 3540,2417 3526.5,2417 3526.5,2357 3594.5,2289 3678,2289 R8.2
NetC11_2: C11.2 R8.1 U3.3 | length 575.4
  Top Layer w10: v1(3318,2407) 3385,2474 U3.3 ; v1(3520,2234) 3550.32,2203.68 ; C11.2 3550.32,2203.68 ; R8.1 3589.32,2255 3550.32,2203.68
  Bottom Layer w10: v1(3318,2407) 3491,2234 v1(3520,2234)
NetC13_1: C13.1 C14.2 R5.2 | length 272.2
  Top Layer w10: C14.2 3895.32,2140 3905.32,2130 3929.69,2130 3970,2089.69 C13.1 R5.2
NetC14_1: C14.1 R6.2 U4.3 | length 972.9
  Top Layer w10: v1(3705,2059) 3686,2078 3686,2164 R6.2 ; v1(3768,2059) 3768,1980 3793,1955 U4.3 ; C14.1 3834.69,2176 3862,2203.31 3945.69,2203.31 v1(3947,2202)
  Bottom Layer w10: v1(3705,2059) v1(3768,2059) ; v1(3768,2059) 3804,2059 v1(3947,2202) 3911,2202 v1(3768,2059)
NetC16_1: C16.1 R9.1 R10.2 | length 860.9
  Top Layer w10: v1(3534,2043) 3489,1998 3455,1998 C16.1 3476,1979.69 3528.69,1927 R10.2 ; R9.1 3927,1776 v1(3967,1816)
  Bottom Layer w10: v1(3534,2043) 3709.48,1867.52 3930,1867.52 3946.02,1851.5 3946.02,1836.98 v1(3967,1816)
NetC17_1: C17.1 R10.1 U4.5 | length 214.8
  Top Layer w10: R10.1 3550,2005 U4.5 3650,2017.24 C17.1
NetC20_2: C20.2 MK1.1 | length 320.1
  Top Layer w10: C20.2 3945,2680 3957,2692 v1(4119,2692)
  Bottom Layer w10: v1(4119,2692) 4158,2653 4158,2631.65 MK1.1
NetC21_2: C21.2 MK2.1 | length 945.3
  Top Layer w10: v1(3560,3082.72) 3560,2887 3580,2867 3599.31,2867 3633.31,2833 3633.31,2750 3623,2739.69 C21.2
  Bottom Layer w10: MK2.1 3330,2727.36 3330,2987 3425.72,3082.72 v1(3560,3082.72)
NetC27_1: C27.1 | length 323.7
  Top Layer w10: C27.1 4905.32,2473 4875,2503.32 4875,2573 4902,2600 4950,2600 5015,2535
NetC27_2: C27.2 | length 107.3
  Top Layer w10: 4815,2535 4844.69,2505.31 C27.2
NetC34_1: C34.1 IC1.4 R13.2 R16.1 | length 698.6
  Top Layer w10: C34.1 5020,2217.6 5000,2237.6 IC1.4 4862,2237.6 4862,2267 4834,2295 4834,2346 4860,2372 R16.1 5040,2372 5085,2417 5085,2460 5113,2488 R13.2
NetD1_C: D1.C R3.2 | length 312.6
  Top Layer w10: D1.C 4494.57,2100.57 4520,2126 4662,2126 4708,2080 R3.2
NetJ1_A5: J1.A5 R1.1 | length 132.1
  Top Layer w10: J1.A5 4184.8,2091.8 4200,2107 R1.1
NetJ1_B5: J1.B5 R2.2 | length 854.9
  Top Layer w10: v1(4058,2143) 4280,2143 4290,2133 R2.2 ; v1(4175.8,1824.2) 4285.2,1933.59 J1.B5
  Bottom Layer w10: v1(4058,2143) 4024,2109 4024,1920 4058,1886 4114,1886 v1(4175.8,1824.2)
NetR3_1: R3.1 U2.5 | length 352
  Top Layer w10: v1(4735,1910) 4735,1913.58 4761.5,1940.07 U2.5 U2.5@4772.72,1960.47 ; R3.1 v1(4865,2080) ; R3.1@4823,2076.5 R3.1@4823,2080
  Bottom Layer w10: v1(4735,1910) 4865,2040 v1(4865,2080)
NetR17_1: R17.1 U6.1 | length 182
  Top Layer w10: U6.1 4127,2625 4182,2680 R17.1
NetR17_2: R17.2 U6.8 | length 85.3
  Top Layer w10: U6.8 4247.24,2667 4248,2667.76 R17.2
NetR18_1: R18.1 U7.1 | length 104.3
  Top Layer w10: U7.1 4885,3162.86 4930.14,3208 R18.1
NetR18_2: R18.2 U7.8 | length 212.4
  Top Layer w10: U7.8 4885,3040 4937,3092 4942,3092 4970,3120 R18.2
NetR19_2: R19.2 R20.1 U8.3 | length 180.5
  Top Layer w10: R20.1 3680,3143 3685,3138 R19.2 3715,3162 3760,3207 U8.3
NetR21_1: R21.1 U10.3 | length 315.3
  Top Layer w10: R21.1 4360,2362 4374,2376 4374,2449 4400,2475 4457.38,2475 4485.49,2446.88 4505,2446.88 U10.3
NetR22_2: R22.2 R26.1 U9.1 | length 451.7
  Top Layer w10: R26.1 3310,2765 3325,2780 R22.2 3425,2801 3440,2816 3458.5,2816 3458.5,2884 3439.9,2902.6 U9.1
NetR23_2: R23.2 U10.2 | length 123.1
  Top Layer w10: R23.2 4442,2332 4455,2345 U10.2
NetR24_1: R24.1 R25.2 U8.2 | length 478.6
  Top Layer w10: R25.2 3615,3413 3628,3400 3628,3382 3680,3330 ; U8.2 3710,3300 3680,3330 ; R24.1 3846,3388 3817,3359 3779.5,3359 3750.5,3330 3680,3330
OUT: R20.2 S2.2 | length 590.8
  Top Layer w10: R20.2 3650,2845 3773,2722 3773,2598 S2.2
"OUT A": R5.1 R9.2 U4.1 U4.2 | length 386.8
  Top Layer w10: U4.1 U4.2 3914,1905 3917,1902 R5.1 3995,1857 4007,1845 4007,1799 3993,1785 R9.2
"OUT KD": S1.2 U10.6 | length 2396.8
  Top Layer w10: U10.6 4505,2540 4518,2527 4555,2527 v1(4582,2500)
  Bottom Layer w10: S1.2 3747.57,2874 3861,2874 3925,2938 5000,2938 5055,2883 5055,2654 4975,2574 4975,2518 4920,2463 4619,2463 v1(4582,2500)
OUT_H: C10.1 S2.1 U3.1 U3.2 | length 1125.6
  Top Layer w10: v1(3435,2717) U3.2 U3.1 ; C10.1 3701.89,2625.32 S2.1
  Bottom Layer w10: v1(3435,2717) 3435,2817 3580.72,2962.72 3635.28,2962.72 3658,2940 3658,2725.43 S2.1
OUT_L: C16.2 S2.3 U4.6 U4.7 | length 1551.2
  Top Layer w10: C16.2 v1(3455,2109) ; U4.7 U4.6 3680,1955 v1(3718,1993)
  Bottom Layer w10: v1(3455,2109) 3532,2186 3842,2186 3876,2220 3876,2310.57 ; v1(3718,1993) 3844,1993 3987,2136 3987,2240 3960,2267 3919.57,2267 3876,2310.57 ; S2.3 3876,2310.57
Ref: C43.1 R19.1 R22.1 U9.5 | length 1120.7
  Top Layer w10: R22.1 3360,2846 3328,2878 3328,2880 3305.4,2902.6 U9.5 3250,2902.6 3240,2912.6 3240,3063 3301,3124 3301,3160 3335,3194 3514,3194 3600,3108 3700,3108 3715,3093 R19.1 3763,3072 3796,3105 C43.1
SIGNAL: R25.1 U1.7 U8.1 | length 1106.8
  Top Layer w10: v1(3590,3176) 3590,3317 ; R25.1 3590,3317 ; U8.1 3660,3247 3590,3317 ; U1.7 4008.23,3256.77 4023,3242 4023,3060 4052,3031 v1(4070,3031)
  Bottom Layer w10: v1(3590,3176) 3925,3176 v1(4070,3031)
SWDIO: J2.3 U1.32 | length 159.6
  Top Layer w10: U1.32 4520.08,3300.08 J2.3
SWDLCK: J2.2 U1.31 | length 136.1
  Top Layer w10: U1.31 4576.77,3256.77 J2.2
V_BATT: C5.1 C32.1 C33.1 IC1.1 IC1.3 U2.3 | length 1012.6
  Top Layer w10: v1(4619,2174.69) C32.1 4701.09,2174.69 IC1.3@4764,2237.6 ; U2.3 4619.84,1980.16 4613.98,1974.3 4613.98,1925.02 v1(4619,1920) 4664.69,1874.31 C5.1 ; IC1.1 4749.4,2312.4 4737,2300 4737,2250 4749.4,2237.6 IC1.3@4764,2237.6 ; C33.1 4920,2099.69 4899.69,2120 4835,2120 4795,2160 4795,2237.6 IC1.3 IC1.3@4764,2237.6
  Bottom Layer w10: v1(4619,1920) v1(4619,2174.69)
V_USB: C1.2 C2.2 C6.2 C8.2 C9.2 D1.A J1.A4 J1.A9 J1.B4 J1.B9 U1.22 U2.1 U2.2 | length 2401.7
  Top Layer w10: J1.B9 J1.A4 ; J1.A9 J1.B4 4318.66,1778.34 4357,1740 4411,1740 4560.32,1889.32 ; U1.22 4367.6,2927.4 4380,2915 4400.63,2915 4415.63,2900 C1.2 C2.2 v1(4462,2805) ; C9.2 4527,1805.32 4532,1810.32 C8.2 4570,1872 4560.32,1881.68 4560.32,1889.32 ; D1.A 4565.43,2040 ; U2.2 4605.59,1999.84 4585.91,2019.53 ; U2.1 4585.91,2019.53 ; 4560.32,1889.32 C6.2 4565.43,2009.12 4565.43,2040 ; 4565.43,2040 4585.91,2019.53
  Bottom Layer w10: J1.B9 4151.34,1929.66 4161,1920 4308.66,1920 4318.66,1930 J1.B4 ; J1.A9 4318.66,2661.66 v1(4462,2805)
VDD_3.3V: C3.2 C4.2 C12.2 C15.2 C22.2 C23.2 C24.2 C25.2 C26.2 C28.1 C35.1 C36.1 C37.1 C38.1 C44.1 C45.1 C46.2 C47.1 C49.1 IC1.5 J2.1 MK1.5 MK2.5 R13.1 U1.14 U3.8 U4.8 U6.7 U7.7 U8.8 U9.3 U9.4 U10.7 | length 11579.4
  Top Layer w10: U9.4 3350,2977.4 ; v1(3301,3025) 3324.69,3025 3339.69,3040 ; v1(3357,2092) 3357,2102.82 3340,2119.82 3340,2130 3339.69,2130.31 C12.2 3339.69,2186.69 3360,2207 3403,2207 3485,2289 U3.8 3485,2434 3512,2461 3512,2588 3476,2624 3476,2751.63 3490,2765.63 C23.2 ; C44.1 3359.69,3112 3339.69,3092 C45.1 3339.69,3040 ; U9.3 3350,2977.4 ; v1(3490,3238) 3490,3369 3631,3510 C46.2 3660,3504.69 U8.8 ; U4.8 3750,1855 3778,1827 ; C15.2 3804.69,1800.31 3778,1827 ; v1(3906,1827) 3778,1827 ; C35.1 4115,2335.32 4120,2330.32 C37.1 4186,2330.32 4186,2561 4200,2575 U6.7 4310,2575 4335,2600 ; C4.2 C3.2 4057.32,2800 4042,2815.32 C22.2 4015,2879 4021.14,2885.14 U1.14 4021.14,2966.14 4046,2991 4100,2991 4126,3017 v1(4126,3339) ; C47.1 4335,2600 ; C49.1 4475,2648 4455,2628 U10.7 4455,2550 4440,2535 ; v1(4512,2487) 4464,2535 4440,2535 ; C24.2 4585,2805.32 4590,2810.32 C25.2 ; J2.1 4610,3016.1 4589.69,2995.79 C38.1 4589.69,2920.31 4625,2885 C25.2 ; 4715,2847.6 4677.72,2810.32 C25.2 ; v1(4790,2625) 4875,2710 4875,2863 4931,2919 4931,3007.1 ; U7.7 4835,2940.79 4861.81,2913.98 4901.29,2913.98 4912.49,2925.17 4912.49,2988.59 4931,3007.1 ; IC1.5 4977.4,2312.4 v1@4980,2315 ; v1(4979,2315) v1@4980,2315 ; C26.2 5064.21,3065.32 5039.21,3040.32 C36.1 C36.1@4964.21,3040.32 ; R13.1 5135,2393 5085,2343 C28.1 v1@4980,2315 ; 3339.69,3040 3339.69,2987.72 3350,2977.4 ; 4335,2600 4335,2580 4380,2535 4440,2535 ; 4931,3007.1 C36.1@4964.21,3040.32 ; 4931,3007.1 4931,3030 4941.32,3040.32 C36.1@4964.21,3040.32
  Bottom Layer w10: MK2.5 3250,2727.36 3250,2974 ; v1(3301,3025) 3250,2974 ; v1(3357,2092) 3660,1789 3906,1789 ; v1(3490,3238) 3448.06,3191.87 3250,2993.81 3250,2974 ; v1@3492.1,3235.9 3595.19,3339 3759.5,3339 3770.5,3350 3799.5,3350 3810.5,3339 v1(4126,3339) 4461,3339 J2.1 ; v1(3906,1827) 3906,1789 ; MK1.5 4080,2631.65 4059,2652.65 4059,2711 4195.6,2847.6 4715,2847.6 ; 4459,2545.73 4459,1769 4443,1753 3933,1753 3906,1780 3906,1789 ; 4459,2546.73 4461.85,2594.45 ; 4462.55,2595.15 4512,2644.6 ; v1(4512,2487) 4512,2644.6 ; v1@4522,2480 4687,2315 v1(4979,2315) ; v1(4790,2625) 4790,2772.6 4715,2847.6 ; 4512,2644.6 4715,2847.6
VDD_-3.3V: C18.1 C19.2 C29.2 C30.2 C31.2 C39.1 C40.1 C41.1 C42.1 C48.2 C50.1 C51.1 U3.4 U4.4 U6.4 U7.4 U8.4 U10.4 | length 6779.4
  Top Layer w10: C42.1 4731,3354 C42.1@4734.69,3350.32
  Top Layer w15: C18.1 3275.18,2426 3335,2485.82 3335,2586 3347.3,2598.3 3383.3,2598.3 v1(3390,2605) ; U8.4 3843.07,3199.69 C48.2 3924,3199.69 3941,3182.69 3941,2922 v1(3965,2898) ; U4.4 3832.24,2043 3839.69,2050.44 C19.2 3820,2090 3799,2111 3799,2203.5 3777.5,2225 3777.5,2280 3822.19,2324.69 C41.1 3909.69,2324.69 v1(3916,2331) ; 3877,2324.69 3916.69,2285 C39.1 ; U6.4 4079.72,2475 4113.3,2441.42 4113.3,2411.7 v1(4120,2405) ; C50.1 4365.32,2265.68 4410,2221 4410,2195 C51.1 4435.32,2213.32 4475,2253 4475,2334 4477,2336 4520,2336 4555,2371 U10.4 4555,2423 4567.5,2423 4624.5,2480 4624.5,2542.5 4614,2553 v1(4614,2580) ; C42.1 4731,3355 4731,3354 4731,3258.69 C40.1 4735,3254.69 U7.4 4735,3100 v1(4755,3080) ; 5015,2847.6 5077.6,2785 ; v1(5100,2615) 5045,2670 5045,2752.4 5077.6,2785 ; C31.2 5104.69,2860 5114.69,2850 C30.2 ; C29.2 5109.69,2735 5114.69,2740 C30.2 ; 5077.6,2785 C30.2
  Bottom Layer w15: v1(3390,2605) 3393,2608 3884.19,2608 ; v1(3916,2331) 4046,2331 v1(4120,2405) 4120,2475 3987,2608 3884.19,2608 ; v1(3965,2898) 4174.19,2898 ; v1(4614,2580) 4813,2580 4833,2600 4833,2770 4773,2830 4773,2871 4800,2898 ; v1(4755,3080) 4806.5,3131.5 4855.6,3131.5 4900,3087.1 4900,3070 5100,2870 v1(5100,2615) ; 5015,2847.6 4964.6,2898 4800,2898 ; 3884.19,2608 4174.19,2898 ; 4174.19,2898 4800,2898
pads on no net: J1.A6 J1.A7 J1.A8 J1.B6 J1.B7 J1.B8 MK1. MK2. U1.2 U1.3 U1.4 U1.5 U1.6 U1.8 U1.9 U1.10 U1.11 U1.12 U1.13 U1.15 U1.16 U1.17 U1.18 U1.19 U1.20 U1.21 U1.23 U1.24 U1.26 U1.27 U1.28 U1.29 U1.30 U1.33 U1.34 U1.35 U1.36 U1.38 U1.39 U1.40 U1.41 U1.42 U1.43 U1.44 U1.45 U1.46 U1.47 U1.48 U1.49 U1.50 U1.51 U1.52 U1.53 U1.54 U1.55 U2.4 U2.7 U2.9 U3.5 U3.6 U3.7 U8.5 U8.6 U8.7 U10.1 U10.8

## Polygon pours and split planes (outlines as drawn)
GND on Top Layer "GND_L01_P048" (solid, remove dead copper, pour order 48): 2915,3820 2920,3815 2920,1610 2930,1600 5410,1600 5410,3835 5385,3810 2930,3810
no net on Top Layer "NONET_L01_P018" (solid, pour order 18): 5040,2075 5040,2484.24 5160.76,2605 5200,2605 5200,2445 5160,2405 5160,2280 5120,2240 5120,2210
no net on Top Layer "NONET_L01_P016" (solid, pour order 16): 3311.3,3198.7 3339.69,3170.32 3339.69,3052.5 3277.5,3052.5 3240,3090
GND on Bottom Layer "GND_L02_P047" (solid, remove dead copper, pour order 47): 2925,3825 2915,3815 2915,1605 5435,1605 5400,1640 5400,3825 2930,3825 2920,3815

## Keep-outs
Keep-Out Layer:
  circle w10: c4185,2670 r1050